# Altium PCB SpeakerMixerBoard.PcbDoc
Units mil, origin at the board's own origin, x right, y up, seen from the top; angles counter-clockwise.
Board outline 6000 x 6000 mil, 2 copper layers (Top Layer, Bottom Layer); 28 components, 38 nets, 103 pads, 32 vias.
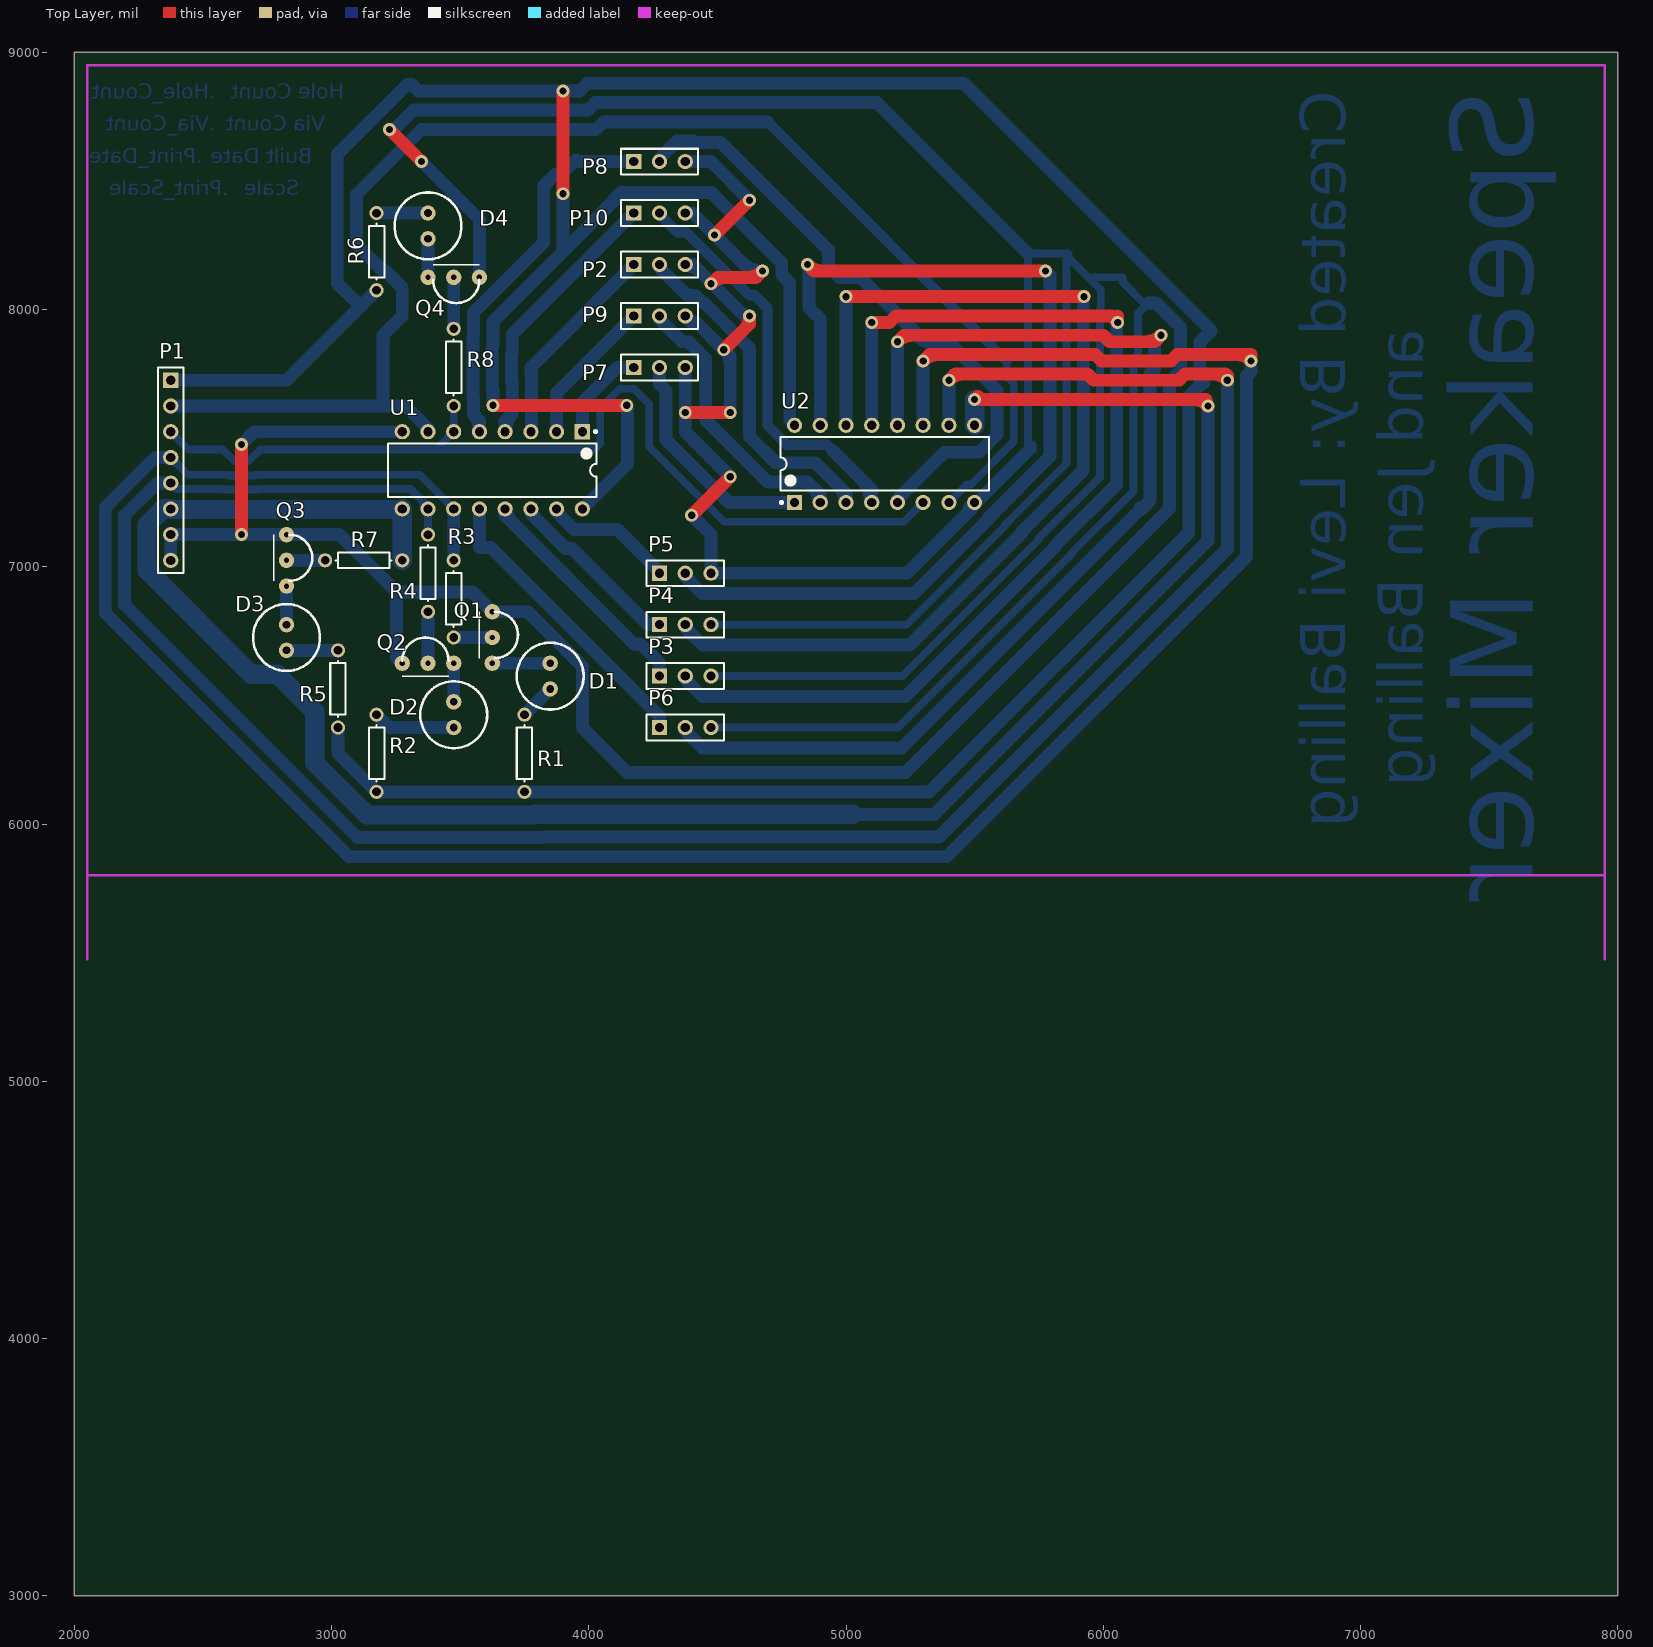
[diagram p0: Top Layer view]
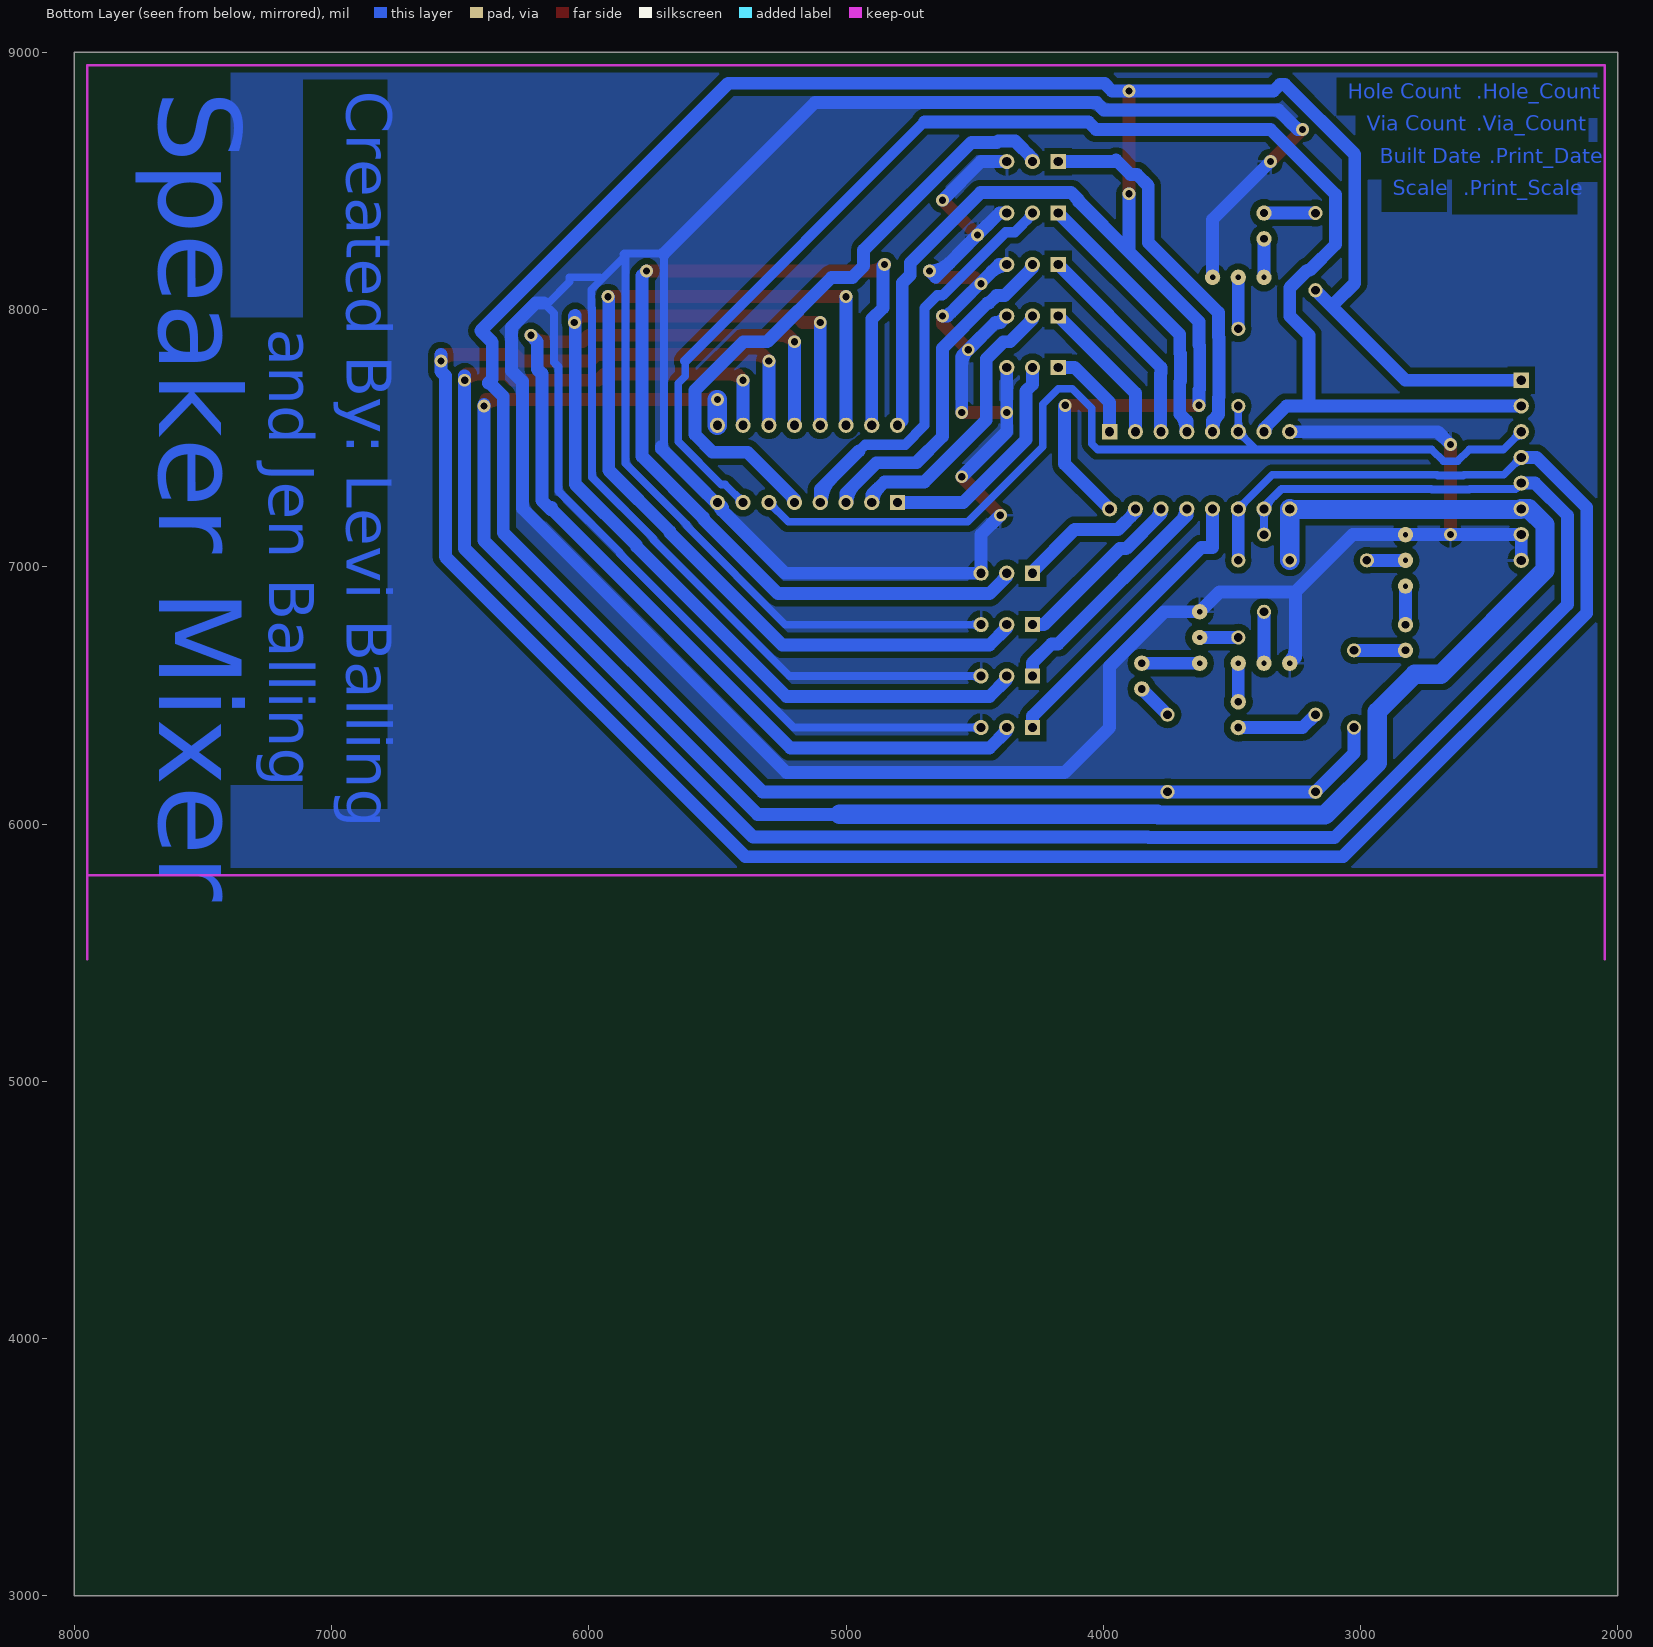
[diagram p1: Bottom Layer view, seen from below]

## Layer stack, top to bottom
Top Layer: signal copper 1.4
Dielectric: dielectric 12.6, FR-4, Dk 4.8
Bottom Layer: signal copper 1.4

## Board outline
2000,3000 8000,3000 8000,9000 2000,9000

## Design rules (kind name [scope] priority, off if disabled: settings)
Clearance [All] p1: gap=25
PolygonConnect [All] p1: connectstyle=Relief reliefconductorwidth=10 reliefentries=4 polygonreliefangle="90 Angle"
RoomDefinition SpeakerMixer [InComponentClass('SpeakerMixer')] p1: confinementstyle=ConfineIn formatcopy=TRUE lockcomponents=FALSE outline 8045,3060 13940,3060 13940,3995 8045,3995
RoutingVias [All] p1: holewidth=32 width=75 viastyle="Through Hole" minholewidth=28 minwidth=50 maxholewidth=28 maxwidth=50
SilkscreenOverComponentPads [All] p1: minsilkscreentomaskgap=10
SolderMaskExpansion [All] p1: expansion=4
Width [All] p1: maxlimit=100 minlimit=25 preferedwidth=50 minimp=50.000000 maximp=50.000000 favimp=50.000000
27 further rules are at their usual default settings.

## Components (designator, comment, footprint, x,y, rotation, side; value= is the part's Value field where it differs from the comment)
D1 "LED_White" LED 3850,6525 r90 top
D2 "LED_White" LED 3475,6375 r90 top
D3 "LED_White" LED 2825,6675 r90 top
D4 "LED_White" LED 3375,8375 r270 top
P1 "Header 8" HDR1X8 2375,7725 r270 top
P2 "Header 3" HDR1X3 4175,8175 r0 top
P3 "Header 3" HDR1X3 4275,6575 r0 top
P4 "Header 3" HDR1X3 4275,6775 r0 top
P5 "Header 3" HDR1X3 4275,6975 r0 top
P6 "Header 3" HDR1X3 4275,6375 r0 top
P7 "Header 3" HDR1X3 4175,7775 r0 top
P8 "Header 3" HDR1X3 4175,8575 r0 top
P9 "Header 3" HDR1X3 4175,7975 r0 top
P10 "Header 3" HDR1X3 4175,8375 r0 top
Q1 "2N3904" 2N3904 3625,6825 r270 top
Q2 "2N3904" 2N3904 3275,6625 r0 top
Q3 "2N3904" 2N3904 2825,7125 r270 top
Q4 "2N3904" 2N3904 3575,8125 r180 top
R1 "Res1" AXIAL-0.3 3750,6275 r90 top
R2 "Res1" AXIAL-0.3 3175,6275 r90 top
R3 "Res1" AXIAL-0.3 3475,6875 r270 top
R4 "Res1" AXIAL-0.3 3375,6975 r270 top
R5 "Res1" AXIAL-0.3 3025,6525 r90 top
R6 "Res1" AXIAL-0.3 3175,8225 r90 top
R7 "Res1" AXIAL-0.3 3125,7025 r180 top
R8 "Res1" AXIAL-0.3 3475,7775 r90 top
U1 "CD4051BCN" N16E 3625,7375 r270 top
U2 "CD4051BCN" N16E 5150,7400 r90 top

## Footprints (in the part's own frame and the unit in brackets; to place one, negate y for a bottom-side part, rotate by r counter-clockwise, add the part's x,y. Pads: shape width x height; smd on the part's side, far side on the other; paste and mask are expansions set on the pad)
2N3904 [mil] "simple transistor, but bigger holes and pads"
  round 60 hole 21: 1(0,0) 2(100,0) 3(200,0)
  silkscreen extent 0,-50 180,100
AXIAL-0.3 [mm] "Axial Device, Thru-Hole; 2 Leads; 0.3 in Pin Spacing"
  round 1.4 hole 0.85: 1(-3.81,0) 2(3.81,0)
  silkscreen extent -2.77,-0.76 2.77,0.76
HDR1X3 [mm] "Connector; Header; 3 Position"
  rect 1.5x1.5 hole 0.9: 1(0,0)
  round 1.5 hole 0.9: 2(2.54,0) 3(5.08,0)
  silkscreen extent -1.27,-1.27 6.35,1.27
HDR1X8 [mm] "Connector; Header; 8 Position"
  rect 1.5x1.5 hole 0.9: 1(0,0)
  round 1.5 hole 0.9: 2(2.54,0) 3(5.08,0) 4(7.62,0) 5(10.16,0) 6(12.7,0) 7(15.24,0) 8(17.78,0)
  silkscreen extent -1.27,-1.27 19.05,1.27
LED [mil] "standard 5mm LED"
  round 60 hole 30: 1(0,0) 2(100,0)
  silkscreen extent -80,-130 180,130
N16E [mm] "DIP, 16-Leads, Row Spacing 7.62mm, Pitch 2.54mm, Body 19.3x6.35mm"
  rect 1.5x1.5 hole 0.9: 1(-3.81,8.89)
  round 1.5 hole 0.9: 2(-3.81,6.35) 3(-3.81,3.81) 4(-3.81,1.27) 5(-3.81,-1.27) 6(-3.81,-3.81) 7(-3.81,-6.35) 8(-3.81,-8.89) 9(3.81,-8.89) 10(3.81,-6.35) 11(3.81,-3.81) 12(3.81,-1.27) 13(3.81,1.27) 14(3.81,3.81) 15(3.81,6.35) 16(3.81,8.89)
  silkscreen extent -3.93,-10.3 2.65,10.32, body extent -3.6,-10.28 3.6,10.28, height 5.08

## Part data
D1 D2 D3 D4: library part LED0, "Typical INFRARED GaAs LED"
P1: "Header, 8-Pin"
P2 P3 P4 P5 P6 P7 P8 P9 P10: "Header, 3-Pin"
Q1 Q2 Q3 Q4: "NPN General Purpose Amplifier"
R1 R2 R3 R4 R5 R6 R7 R8: "Resistor"
U1 U2: "8-Channel Analog Multiplexer/Demultiplexer"

## Via types
v1: diameter 50, hole 28, Top Layer to Bottom Layer, 32 vias

## Nets (pads, with @x,y where several pads share a name; then routed paths per layer and width w, separated by ;. In a path a pad name is that pad's centre, name@x,y a point inside that pad or via, vN(x,y) a via of type N, cw(c..) or ccw(c..) an arc to the next point about the centre after c; other vN are vias at no path point)
-5: P1.2 U1.7 U2.7 | length 5773.4
  Bottom Layer w30: U2.7 5469.53,7319.53 5485.19,7319.53 5652.5,7486.83 5652.5,7713.17 5625,7740.67 5625,7800 ; U2.7@5400,7264.53 ccw(c5400,7299.6) 5424.8,7274.8 ccw(c5449.6,7250) U2.7@5414.53,7250
  Bottom Layer w40: 4695.47,8729.53 5625,7800
  Bottom Layer w50: P1.2 3200,7625 ; 3358.45,7554.01 cw(c3329.44,7525) U1.7@3370.47,7525 ; U1.7 3375,7537.47 3287.47,7625 3200,7625 ; 4695.47,8729.53 4057.6,8729.53 4028.08,8700 3350,8700 3097.44,8447.44 3097.44,8252.56 3197.44,8152.56 3207.13,8152.56 3275,8084.69 3275,7975 3200,7900 3200,7625
DEMUX_A: P1.4 R3.1 U1.11 U2.11 | length 10061.3
  Top Layer w50: 5360.36,7825 ccw(c5360.36,7739.64) v1(5300,7800) 5325,7825 5968.93,7825 5993.93,7800 6262.87,7800 6287.87,7825 6575,7825 v1(6575,7800) ccw(c6514.64,7739.64) 6514.64,7825
  Bottom Layer w30: P1.4@2375,7410.47 cw(c2375,7375.4) 2399.8,7400.2 cw(c2424.6,7425) P1.4@2389.53,7425 ; P1.4 2442.5,7357.5 2597.79,7357.5 2600.29,7355 2699.71,7355 2702.21,7357.5 3342.5,7357.5 U1.11 ; U1.11@3460.47,7225 ccw(c3425.4,7225) 3450.2,7249.8 ccw(c3475,7274.6) U1.11@3475,7239.53
  Bottom Layer w50: P1.4 2315.04,7425 2120.47,7230.43 2120.47,6820.47 3068.5,5872.44 5390.64,5872.44 6557.5,7039.3 6557.5,7742.5 6575,7760 6575,7825 ; R3.1 U1.11 ; U2.11 v1(5300,7800)
DEMUX_B: P1.5 R4.1 U1.10 U2.10 | length 9100.2
  Top Layer w50: v1(5400,7725) cw(c5460.36,7664.64) 5460.36,7750 ; v1@5412.5,7737.5 5425,7750 5937.87,7750 5962.87,7725 6293.93,7725 6318.93,7750 6475,7750 6482.5,7742.5 v1(6482.5,7725) ccw(c6422.14,7664.64) 6422.14,7750
  Bottom Layer w30: P1.5 2397.5,7302.5 2575.01,7302.5 2577.51,7300 2722.49,7300 2724.99,7302.5 3307.1,7302.5 3375,7234.6 U1.10 R4.1 ; 3343.41,7266.19 cw(c3302.22,7225) U1.10@3360.47,7225 ; U1.10@3364.73,7214.73 cw(c3339.93,7189.93) 3375,7189.93 cw(c3410.07,7189.93) U1.10@3385.27,7214.73 ; R4.1@3366.12,7133.88 ccw(c3344.68,7155.32) 3375,7155.32 ccw(c3405.32,7155.32) R4.1@3383.88,7133.88
  Bottom Layer w50: P1.5 2321.11,7325 2195.47,7199.36 2195.47,6853.42 3101.45,5947.44 3823.55,5947.44 3826.11,5950 5362.13,5950 6482.5,7070.37 v1@6482.5,7742.5 ; U2.10 v1(5400,7725)
DEMUX_C: P1.6 R7.1 U1.9 U2.9 | length 8062.2
  Top Layer w50: v1@5512.5,7662.5 5525,7650 6400,7650 ; 6347.14,7650 cw(c6347.14,7564.65) v1(6407.5,7625)
  Bottom Layer w50: 5025,6037.5 5343.57,6037.5 6407.5,7101.43 v1@6407.5,7631.07
  Bottom Layer w75: R7.1 U1.9 3272.5,7222.5 2377.5,7222.5 P1.6 2344.85,7225 2282.97,7163.12 2282.97,6986.88 2687.35,6582.5 2788.68,6582.5 2934.94,6436.24 2934.94,6237.7 3137.7,6034.94 3787.3,6034.94 3789.86,6037.5 5025,6037.5 ; U2.9 v1(5500,7650)
DEMUX_EN: P1.3 R8.1 U1.6 U2.6 | length 3978.7
  Bottom Layer w30: P1.3@2375,7510.47 cw(c2375,7475.4) 2399.8,7500.2 cw(c2424.6,7525) P1.3@2389.53,7525 ; P1.3 2444.53,7455.47 2577.6,7455.47 2623.08,7410 2676.92,7410 2722.4,7455.47 3405.47,7455.47 ; U1.6@3460.47,7525 cw(c3425.4,7525) 3450.2,7500.2 cw(c3475,7475.4) U1.6@3475,7510.47 ; U1.6@3464.73,7535.27 ccw(c3439.93,7560.07) 3475,7560.07 ccw(c3510.07,7560.07) U1.6@3485.27,7535.27 ; R8.1@3466.12,7616.12 cw(c3444.68,7594.68) 3475,7594.68 cw(c3505.32,7594.68) R8.1@3483.88,7616.12 ; R8.1 U1.6 3405.47,7455.47 ; U2.6@5285.47,7250 cw(c5250.4,7250) 5275.2,7225.2 cw(c5300,7200.4) U2.6@5300,7235.47 ; U2.6 5225,7175 4527.01,7175 4235,7467.01 4235,7631.92 4174.36,7692.56 4120.52,7692.56 4044.53,7616.57 4044.53,7478.9 4021.1,7455.47 3405.47,7455.47
GND: P1.7 P1.8 P2.3 P3.3 P4.3 P5.3 P6.3 P7.3 P8.3 P9.3 P10.3 Q1.1 Q2.1 Q3.1 Q4.1 U1.8 U2.8 | length 25308.3
  Top Layer w50: v1(2650,7125) v1(2650,7475) ; v1(3225,8700) v1(3350,8575) ; v1(4375,7600) v1(4550,7600) ; v1(4400,7200) v1(4550,7350) ; v1(4489.33,8289.33) v1(4625,8425) ; v1(4525,7843.53) 4625,7943.53 v1(4625,7975) cw(c4549.04,7975) 4602.75,7921.29 ; 4535.36,8125 ccw(c4535.36,8039.64) v1(4475,8100) 4500,8125 4650,8125 v1(4675,8150) cw(c4614.64,8210.36) 4614.64,8125
  Bottom Layer w30: P6.3 5203.15,6375 5879.53,7051.37 5879.53,7056.25 6117.5,7294.22 6117.5,7777.62 6135,7795.12 6135,7985 6175,8025 6158.08,8025 6075,8108.08 6075,8125 5958.08,8125 ; P3.3 5219.31,6575 5749.53,7105.22 5749.53,7110.1 5987.5,7348.07 5987.5,8004.42 5990,8006.92 5990,8076.92 5859.42,8207.5 5857.5,8207.5 ; P4.3 5235.46,6775 5619.53,7159.07 5619.53,7163.95 5857.5,7401.92 5857.5,8207.5 ; P6.3@4485.27,6364.73 cw(c4510.07,6339.93) 4510.07,6375 cw(c4510.07,6410.07) P6.3@4485.27,6385.27 ; P3.3@4485.27,6564.73 cw(c4510.07,6539.93) 4510.07,6575 cw(c4510.07,6610.07) P3.3@4485.27,6585.27 ; P4.3@4485.27,6764.73 cw(c4510.07,6739.93) 4510.07,6775 cw(c4510.07,6810.07) P4.3@4485.27,6785.27 ; 5717.5,7459.91 5707.5,7469.91 5707.5,8217.5 5862.5,8217.5 5865,8215 5857.5,8207.5
  Bottom Layer w50: P1.8 P1.7 v1(2650,7125) Q3.1 3030.12,7125 3252.56,6902.56 ; v1(2650,7475) 2700,7525 U1.8 ; 3252.56,6691.25 ccw(c3341.25,6691.25) Q2.1@3278.54,6628.54 ; 3257.32,8713.39 cw(c3225,8745.71) v1(3225,8700) 3243.93,8700 3318.93,8775 3997.01,8775 4026.54,8804.53 5120.47,8804.53 5707.5,8217.5 ; Q2.1 3252.56,6647.44 3252.56,6902.56 ; v1(3350,8575) 3575,8350 Q4.1 ; P7.3 v1(4375,7600) 4375,7525 v1(4550,7350) ; P9.3 4400,7950 4418.53,7950 ; P2.3@4375,8170.47 cw(c4375,8085.51) 4435.08,8145.59 ; P2.3 4405.67,8175 4605.67,7975 v1(4625,7975) cw(c4625,8021.67) 4592,7988.67 ; P10.3 4403.66,8375 v1(4489.33,8289.33) 4651.83,8126.83 v1(4675,8150) cw(c4675,8261.88) 4595.89,8182.77 ; P8.3 4475,8575 v1(4625,8425) ; P9.3@4379.21,7976.67 ccw(c4418.53,7992.33) 4418.53,7950 ; v1(4400,7200) 4475,7125 P5.3 5237.47,6975 5479.53,7217.06 5479.53,7229.53 U2.8 5507.59,7250 5717.5,7459.91 5717.5,7467.5 ; v1(4550,7600) 4550,7818.53 v1(4525,7843.53) ; 4550,7783.18 ccw(c4464.64,7783.18) v1(4525,7843.53) ; 6175,8025 6206.07,8025 6300,7931.07 6300,7762.13 6257.5,7719.63 6257.5,7226.43 5231.07,6200 4150,6200 3975,6375 3975,6613.14 3763.14,6825 Q1.1 3547.44,6902.56 3252.56,6902.56 ; 4418.53,7950 v1(4525,7843.53) ; 5483.45,7220.99 ccw(c5454.44,7250) 5495.47,7250 cw(c5454.44,7250) 5483.45,7220.99
NetD1_1: D1.1 R1.2 | length 141.4
  Bottom Layer w50: R1.2 D1.1
NetD1_2: D1.2 Q1.3 | length 225
  Bottom Layer w50: Q1.3 D1.2
NetD2_1: D2.1 R2.2 | length 320.7
  Bottom Layer w50: R2.2 3225,6375 D2.1
NetD2_2: D2.2 Q2.3 | length 150
  Bottom Layer w50: D2.2 Q2.3
NetD3_1: D3.1 R5.2 | length 200
  Bottom Layer w50: D3.1 R5.2
NetD3_2: D3.2 Q3.3 | length 150
  Bottom Layer w50: D3.2 Q3.3
NetD4_1: D4.1 R6.2 | length 200
  Bottom Layer w50: R6.2 D4.1
NetD4_2: D4.2 Q4.3 | length 150
  Bottom Layer w50: Q4.3 D4.2
NetQ1_2: Q1.2 R3.2 | length 150
  Bottom Layer w50: R3.2 Q1.2
NetQ2_2: Q2.2 R4.2 | length 200
  Bottom Layer w50: Q2.2 R4.2
NetQ3_2: Q3.2 R7.2 | length 150
  Bottom Layer w50: Q3.2 R7.2
NetQ4_2: Q4.2 R8.2 | length 200
  Bottom Layer w50: R8.2 Q4.2
PC_RING_-5V_SIG: P2.2 U2.3 | length 1434
  Bottom Layer w50: P2.2@4275,8162.53 4383,8054.53 4414.41,8054.53 4443.93,8025 4449.6,8025 4625,7849.6 4625,7506.07 4726.54,7404.53 4881.3,7404.53 5000,7285.83 U2.3 ; P2.2@4279.53,8175 ccw(c4320.56,8175) 4291.55,8145.99 ; 4966.93,7318.9 cw(c4898.04,7250) U2.3@4995.47,7250
PC_TIP_+5_SIG: P2.1 U1.3 | length 817.8
  Bottom Layer w50: U1.3 3777.56,7527.56 3777.56,7750.32 3775,7752.88 3775,7775 P2.1
SPEAKER1_RING_-5V_SIG: P3.2 U2.13 | length 4180.9
  Top Layer w50: v1(5100,7950) 5168.93,7950 5193.93,7975 6031.07,7975 6044.1,7961.97 6056.07,7973.93 v1(6056.07,7950)
  Bottom Layer w50: P3.2 4375,6562.53 4442.06,6495.47 5231.7,6495.47 5814.53,7078.3 5814.53,7083.18 6052.5,7321.15 6052.5,7977.5 6056.07,7973.93 v1(6056.07,7950) ; P3.2@4379.53,6575 ccw(c4420.56,6575) 4391.55,6545.99 ; U2.13 v1(5100,7950)
SPEAKER1_TIP_+5_SIG: P3.1 U1.13 | length 969.1
  Bottom Layer w50: U1.13 3675,7200.4 4175.4,6700 4201.54,6700 4275,6626.54 P3.1 ; U1.13@3679.53,7225 ccw(c3749.85,7225) 3700.12,7175.27
SPEAKER2_RING_-5V_SIG: P4.2 U2.14 | length 4005.3
  Top Layer w50: v1(5000,8050) v1(5925,8050)
  Bottom Layer w50: P4.2 4375,6762.53 4442.06,6695.47 5247.85,6695.47 5684.53,7132.15 5684.53,7137.02 5922.5,7375 5922.5,8047.5 v1(5925,8050) ; P4.2@4379.53,6775 ccw(c4420.56,6775) 4391.55,6745.99 ; U2.14 v1(5000,8050)
SPEAKER2_TIP_+5_SIG: P4.1 U1.14 | length 741
  Bottom Layer w50: U1.14 3775,7206.47 3910.99,7070.47 3935.59,7070.47 4231.07,6775 P4.1 ; U1.14@3779.53,7225 ccw(c3835.21,7225) 3795.84,7185.63
SPEAKER3_RING_-5V_SIG: P5.2 U2.15 | length 4090.3
  Top Layer w50: 4910.36,8150 cw(c4910.36,8235.36) v1(4850,8175) 4875,8150 v1(5775,8150)
  Bottom Layer w50: P5.2 4375,6962.53 4442.06,6895.47 5264.01,6895.47 5554.53,7185.99 5554.53,7190.87 5792.5,7428.84 5792.5,8132.5 v1(5775,8150) ; P5.2@4379.53,6975 ccw(c4420.56,6975) 4391.55,6945.99 ; v1(4850,8175) 4856.43,8168.57 4856.43,8006.43 4900,7962.87 U2.15
SPEAKER3_TIP_+5_SIG: P5.1 U1.15 | length 546.6
  Bottom Layer w50: U1.15 3875,7212.53 3942.06,7145.47 4110.59,7145.47 4275,6981.07 P5.1 ; U1.15@3879.53,7225 ccw(c3920.56,7225) 3891.55,7195.99
SPEAKER4_RING_-5V_SIG: P6.2 U2.12 | length 4460.6
  Top Layer w50: 5260.36,7900 ccw(c5260.36,7814.64) v1(5200,7875) 5225,7900 6000,7900 6025,7875 6200,7875 v1(6225,7900) cw(c6164.64,7960.36) 6164.64,7875
  Bottom Layer w50: P6.2 4375,6362.53 4442.06,6295.47 5215.55,6295.47 6145,7224.92 6145,7229.8 ; P6.2@4379.53,6375 ccw(c4420.56,6375) 4391.55,6345.99 ; U2.12 v1(5200,7875) ; 6145,7220 6182.5,7257.5 6182.5,7750.7 6200,7768.2 6200,7875 v1(6225,7900)
SPEAKER4_TIP_+5_SIG: P6.1 U1.12 | length 1165.8
  Bottom Layer w50: U1.12 3575,7075 3619.2,7075 4275,6419.2 P6.1
SPEAKER5_RING_-5V_SIG: P7.2 U2.1 | length 892.5
  Bottom Layer w50: P7.2 4275,7708.85 4300,7683.85 4300,7493.93 4543.93,7250 U2.1
SPEAKER5_TIP_+5_SIG: P7.1 U1.1 | length 370.3
  Bottom Layer w50: U1.1 3975,7638.97 4111.03,7775 P7.1
SPEAKER6_RING_-5V_SIG: P8.2 U2.5 | length 2531.2
  Bottom Layer w50: P8.2 4275,8587.47 4342.06,8654.53 4407.94,8654.53 4412.47,8650 4512.47,8650 4931.43,8231.03 4931.43,8168.93 4975.37,8125 5056.07,8125 5306.07,7875 5398.74,7875 5587.5,7686.24 5587.5,7513.76 5518.74,7445 5382.53,7445 5200,7262.47 U2.5 ; P8.2@4279.53,8575 cw(c4320.56,8575) 4291.55,8604.01 ; U2.5@5204.53,7250 cw(c5245.56,7250) 5216.55,7279.01
SPEAKER6_TIP_+5_SIG: P8.1 U1.5 | length 1545.1
  Bottom Layer w50: U1.5@3570.61,7526.1 ccw(c3504,7542.82) 3552.56,7591.37 ; U1.5 3575,7568.93 3552.56,7591.37 ; P8.1 3956.07,8575 3950,8581.07 3893.93,8525 3868.93,8525 3825,8481.07 3825,8260.83 3552.56,7988.39 3552.56,7892.87 3550,7890.31 3550,7659.69 3551.81,7657.88 3552.56,7657.13 3552.56,7591.37
SPEAKER7_RING_-5V_SIG: P9.2 U2.2 | length 1186.4
  Bottom Layer w50: P9.2 4275,7962.53 4362.53,7875 4387.47,7875 4454.53,7807.94 4454.53,7570.47 4695.47,7329.53 4850.24,7329.53 4900,7279.77 U2.2 ; P9.2@4279.53,7975 ccw(c4320.56,7975) 4291.55,7945.99 ; 4871.22,7308.54 cw(c4812.68,7250) U2.2@4895.47,7250
SPEAKER7_TIP_+5_SIG: P9.1 U1.2 | length 574.3
  Bottom Layer w50: U1.2 3875,7675 P9.1
SPEAKER8_RING_-5V_SIG: P10.2 U2.4 | length 1721.9
  Bottom Layer w40: P10.2 4275,8369.6 4344.13,8300.47 4379.19,8300.47 4624.66,8055 4645,8055 4695,8005 4695,7549.6 4770.07,7474.53 4925.47,7474.53 4950,7450 ; P10.2@4284.53,8375 ccw(c4320.56,8375) 4295.08,8349.52
  Bottom Layer w50: 4950,7450 5100,7300 U2.4 ; 5056.92,7343.08 cw(c4963.83,7250) U2.4@5095.47,7250
SPEAKER8_TIP_+5_SIG: P10.1 U1.4 | length 1133.9
  Bottom Layer w50: U1.4 3675,7566.37 3702.56,7593.93 ; U1.4@3679.49,7525.61 cw(c3760.01,7536.47) 3702.56,7593.93 ; P10.1 3702.56,7902.56 3702.56,7830.74 3700,7828.18 3700,7721.82 3702.56,7719.26 3702.56,7593.93
VCC: P1.1 R1.1 R2.1 R5.1 R6.1 U1.16 U2.16 | length 14253.1
  Top Layer w50: v1(3627.56,7627.56) v1(4147.44,7627.56) ; v1(3900,8450) v1(3900,8850)
  Bottom Layer w50: P1.1 2825,7725 R6.1 ; R5.1 3025,6275 R2.1 R1.1 5325,6125 6332.5,7132.5 6332.5,7662.13 6385.18,7714.82 6390.55,7714.82 6375,7730.37 6375,7872.87 6419.63,7917.5 5457.6,8879.53 3995.47,8879.53 3965.94,8850 3337.87,8850 3312.87,8875 3293.93,8875 3022.44,8603.51 3022.44,8102.56 3100,8025 ; v1(3627.56,7627.56) 3627.56,7688.19 3625,7690.75 3625,7859.25 3627.56,7861.81 3627.56,7952.56 3900,8225 ; v1(3900,8450) 3900,8225 ; U1.16 4150,7400 v1@4150,7625 ; U2.16 4781.43,7568.57 4781.43,8103.29 4750,8134.72 4750,8181.07 4476.54,8454.53 4124.76,8454.53 4095.47,8425.24 4095.47,8420.47 3900,8225
"": 

## Polygon pours and split planes (outlines as drawn)
GND on Bottom Layer "GndPlane" (solid, pour order 2): 2050,5800 7950,5800 7950,9000 7925,8974.6 2050,8974.6 2050,9000

## Keep-outs
Keep-Out Layer:
  lines w10: 2050,5475 2050,8950 7950,8950 7950,5475 ; 2050,5800 7950,5800

## Other copper
Bottom Layer:
  text "Created By: Levi Balling" at 7000,8850 h300 r90
  text "Speaker Mixer" at 7775,8850 h550 r90
  text ".Hole_Count" at 2550,8800 h100
  text "Hole Count" at 3050,8800 h100
  text ".Via_Count" at 2550,8675 h100
  text "Via Count" at 2975,8675 h100
  text ".Print_Date" at 2500,8550 h100
  text "Built Date" at 2925,8550 h100
  text ".Print_Scale" at 2600,8425 h100
  text "Scale" at 2875,8425 h100
  text "and Jen Balling" at 7300,7925 h300 r90

## Silkscreen, mask and mechanical layers (free items; w line width, h text height)
Drill Drawing:
  text "Drill Drawing." at 12755,3255 h60
  text ".LEGEND" at 12825,3160 h60

## Dimensions
2050,5475 to 2050,8950 on Mechanical 1
2050,5800 to 7950,5800 on Mechanical 1